# Altium PCB PCB_Songram-M071_2024-09-20.pcbdoc
Units mil, origin at the board's own origin, x right, y up, seen from the top; angles counter-clockwise.
Board outline 5724.4 x 5724.4 mil, 2 copper layers (Top Layer, Bottom Layer); 9 components, 38 nets, 66 pads, 4 vias.
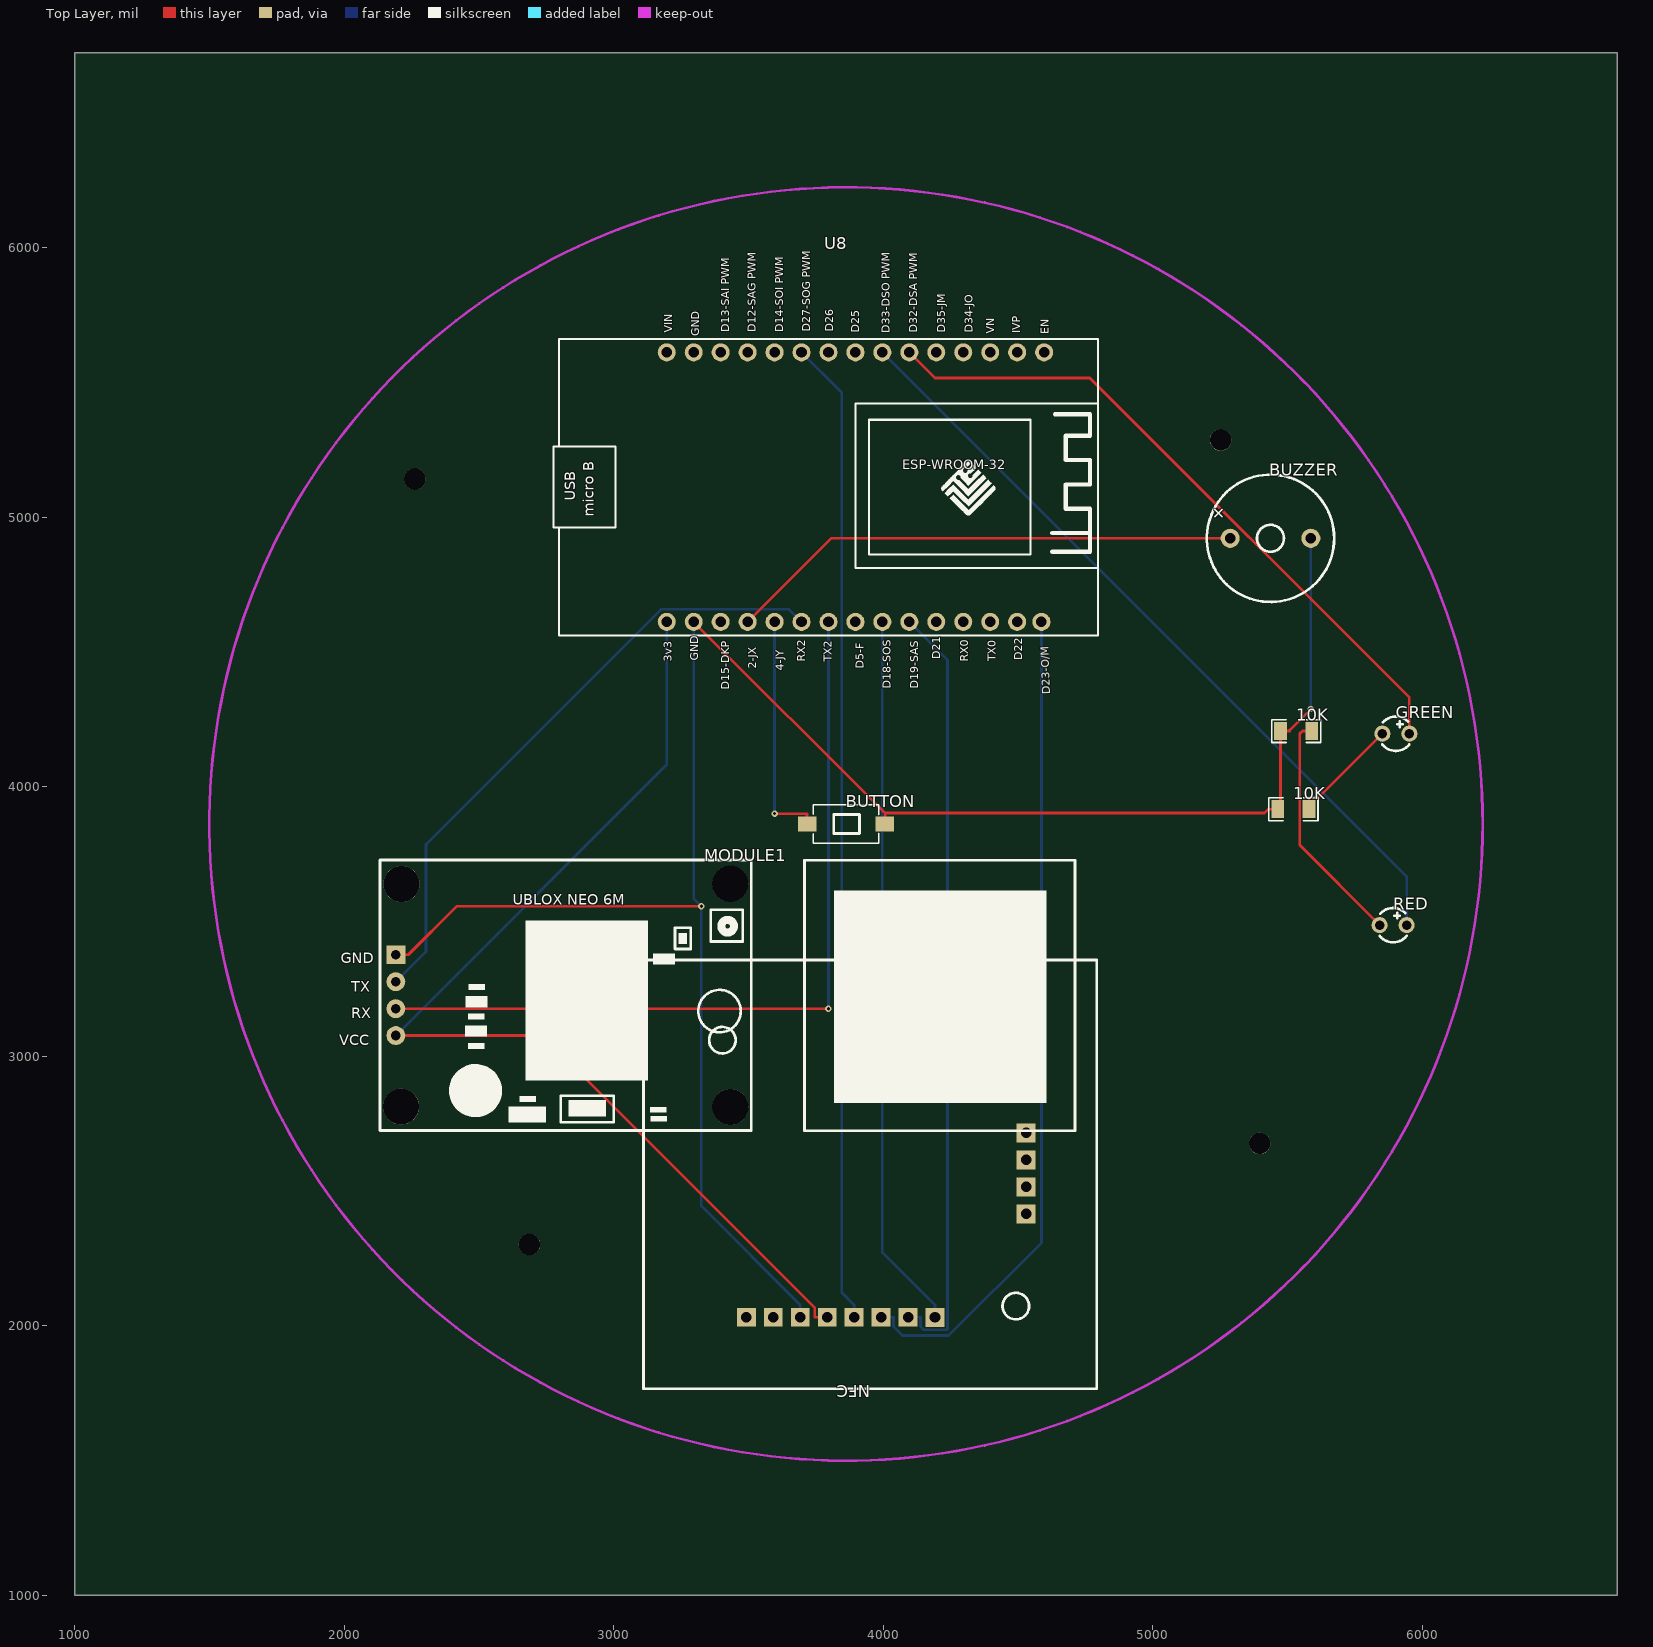
[diagram p0: Top Layer view]
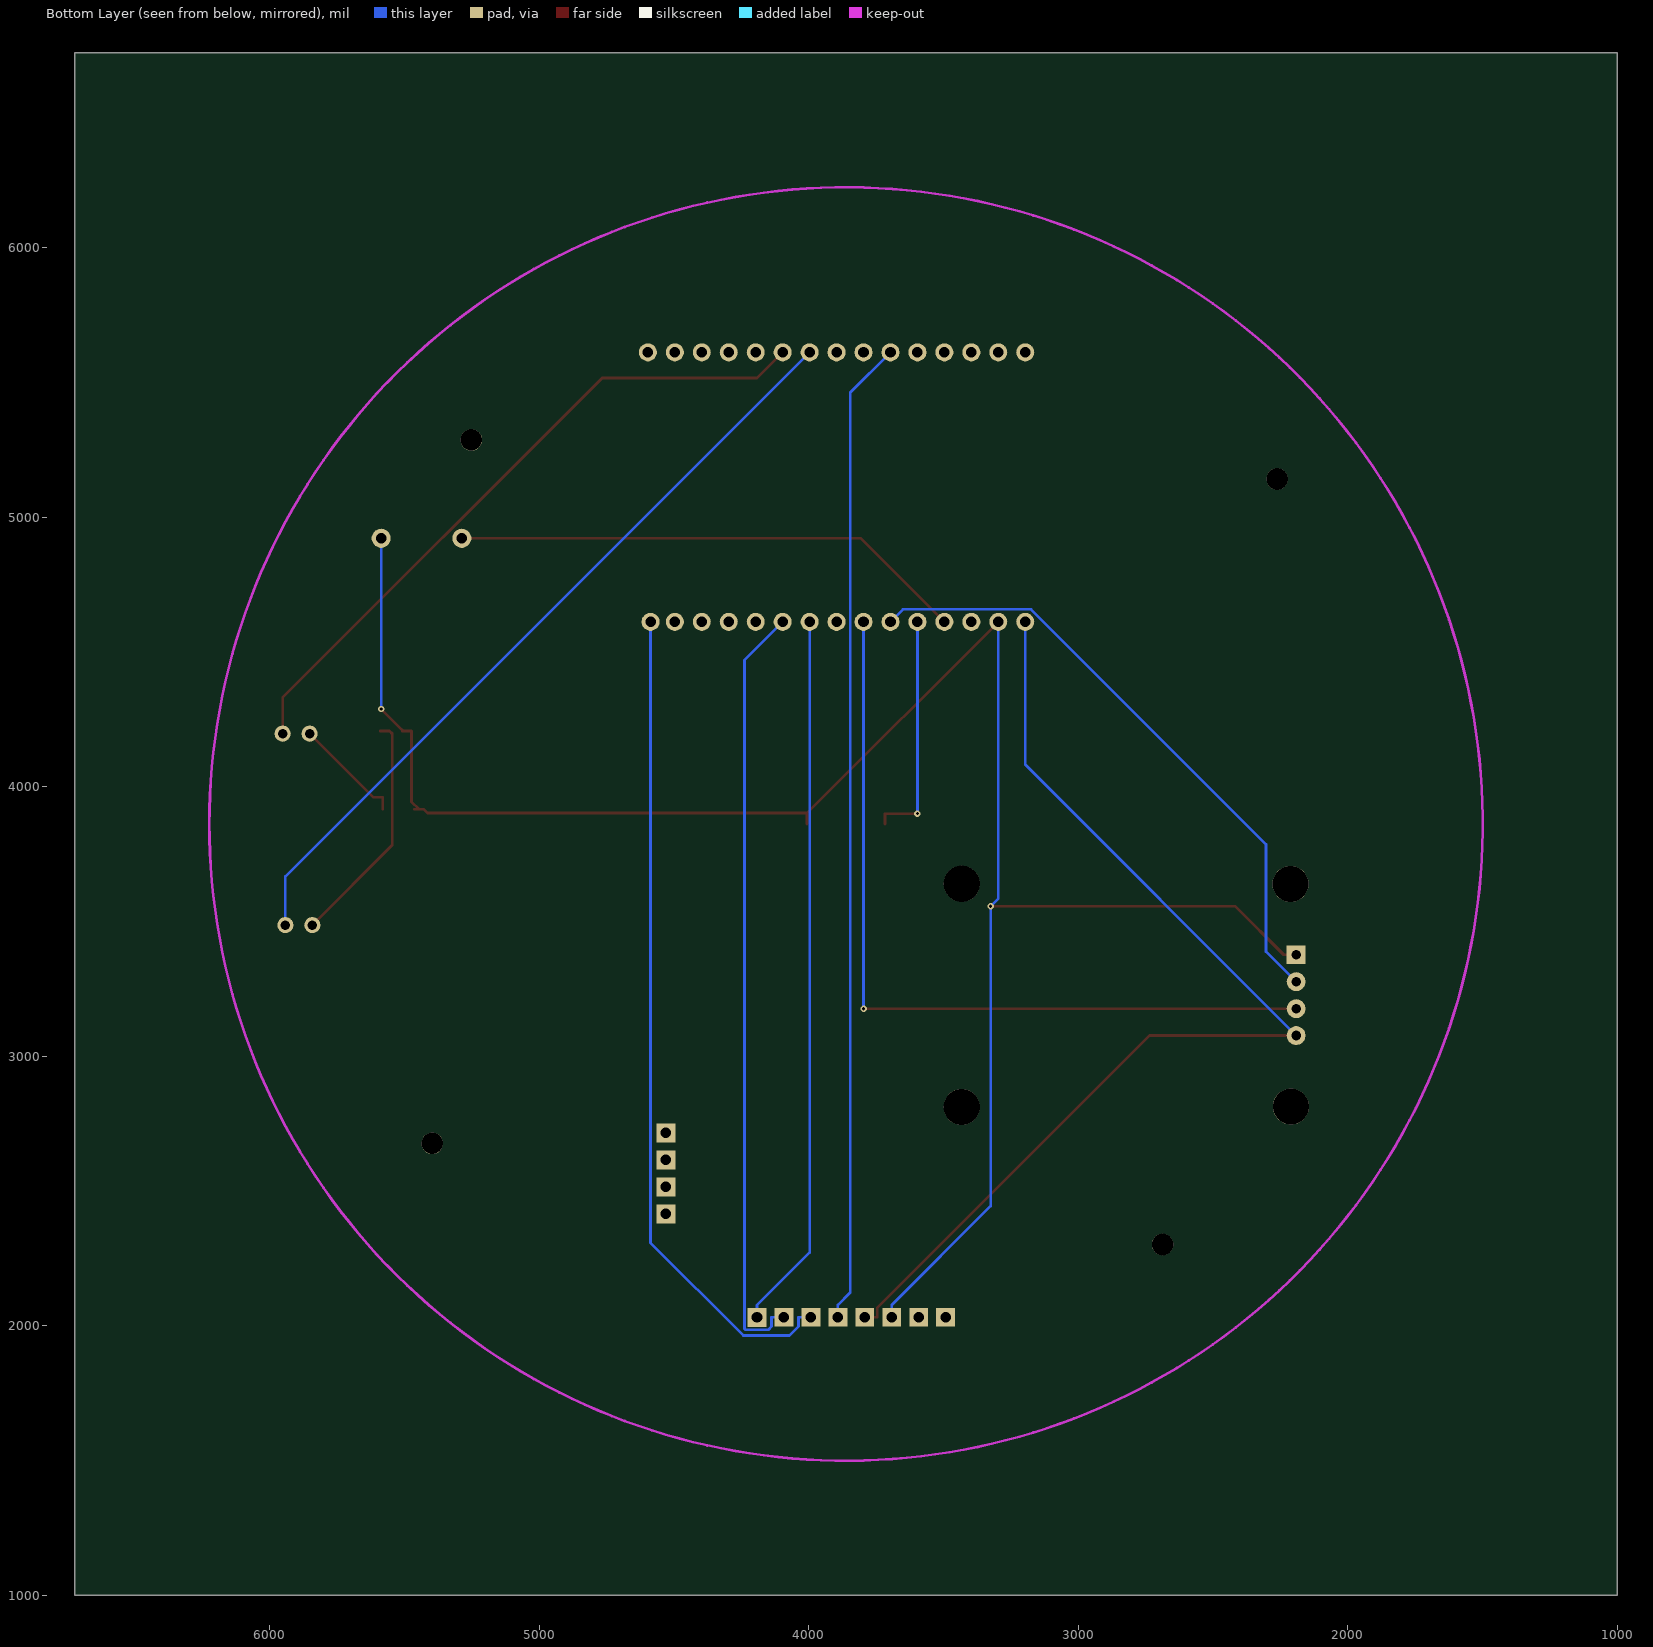
[diagram p1: Bottom Layer view, seen from below]

## Layer stack, top to bottom
Top Layer: signal copper (thickness not stored)
Dielectric: dielectric 12.6, FR-4, Dk 4.8
Bottom Layer: signal copper (thickness not stored)

## Board outline
6724.4,1000 1000,1000 1000,6724.4 6724.4,6724.4

## Components (designator, comment, footprint, x,y, rotation, side; value= is the part's Value field where it differs from the comment)
10K "10kΩ" R1206 5532.2,4207.2 r0 top
10K "10kΩ" R1206 5522.2,3917.2 r0 top
BUTTON "BUTTON2" SW-SMD_L6.0-W3.5-LS8.0-1 3862.2,3862.2 r0 top
BUZZER "BUZZER-12X9" BUZ-TH_BD12.0-P7.60-D0.6-FD 5437.2,4922.2 r0 top
GREEN "Green" LED-TH_BD3.0-P2.54-RD-RED 5902.2,4197.2 r0 top
MODULE1 "UBLOX NEO 6M GPS MODULE" "UBLOX NEO 6M GPS MODULE" 2192.2,3377.2 r0 top
NFC "PN532 NFC RFID module V3" "PN532 NFC RFID MODULE V3" 4792.2,1767.2 r180 top
RED "RED" LED-TH_BD3.0-P2.54-RD-RED 5892.2,3487.2 r0 top
U8 "esp-32-devkit" ESP-32-DEVKIT 3862.2,5067.2 r0 top

## Footprints (in the part's own frame and the unit in brackets; to place one, negate y for a bottom-side part, rotate by r counter-clockwise, add the part's x,y. Pads: shape width x height; smd on the part's side, far side on the other; paste and mask are expansions set on the pad)
BUZ-TH_BD12.0-P7.60-D0.6-FD [mm]
  round 1.8 hole 1 paste+0 mask+0.051: 1(-3.8,0) 2(3.8,0)
  silkscreen extent -6,-6 6,6
ESP-32-DEVKIT [mm]
  round 1.7 hole 1 paste+0 mask+0.102: 1(-16.891,-11.557) 2(-14.351,-11.557) 3(-11.811,-11.557) 4(-9.271,-11.557) 5(-6.731,-11.557) 6(-4.191,-11.557) 7(-1.651,-11.557) 8(0.889,-11.557) 9(3.429,-11.557) 10(5.969,-11.557) 11(8.509,-11.557) 12(11.049,-11.557) 13(13.589,-11.557) 14(16.129,-11.557) 15(18.415,-11.557) 16(18.669,13.843) 17(16.129,13.843) 18(13.589,13.843) 19(11.049,13.843) 20(8.509,13.843) 21(5.969,13.843) 22(3.429,13.843) 23(0.889,13.843) 24(-1.651,13.843) 25(-4.191,13.843) 26(-6.731,13.843) 27(-9.271,13.843) 28(-11.811,13.843) 29(-14.351,13.843) 30(-16.891,13.843)
  silkscreen extent -27.56,-12.83 23.75,15.11
LED-TH_BD3.0-P2.54-RD-RED [mil]
  round 60 hole 35.43 paste+0 mask+2: 1(-50,0) 2(50,0)
  silkscreen extent -50,-64 50,64
"PN532 NFC RFID MODULE V3" [mil]
  rect 70x70 hole 39 paste+0 mask+2: 1(261.65,-948.66) 2(261.65,-848.66) 3(261.65,-748.66) 4(261.65,-648.66) 5(599.8,-264.29) 6(699.8,-265) 7(799.8,-265) 8(899.8,-265) 9(999.8,-265) 10(1099.8,-265) 11(1199.8,-265) 12(1299.8,-265)
  silkscreen extent 0,-1591 1681,0
R1206 [mil]
  rect 47.54x66.97 smd paste-3937.01 mask+2: 1(-58.22,0) 2(58.22,0)
  silkscreen extent -91,-42 91,42
SW-SMD_L6.0-W3.5-LS8.0-1 [mm]
  rect 1.74x1.4 smd paste+0 mask+0.051: 1(-3.67,0) 2(3.67,0)
  silkscreen extent -3.08,-1.83 3.08,1.83
"UBLOX NEO 6M GPS MODULE" [mm]
  rect 1.778x1.778 hole 0.914 paste+0 mask+0.102: 1(0,0)
  round 1.778 hole 0.914 paste+0 mask+0.102: 2(0,-2.54) 3(0,-5.08) 4(0,-7.62)
  round 3.4 hole 3.4 unplated paste+0: ""(0.494,-14.311) ""(0.525,6.664) ""(31.508,-14.344) ""(31.508,6.692)
  silkscreen extent -1.5,-16.58 64,8.93

## Free pads (board coordinates)
  round 80 hole 80 unplated paste+0: ""(2262.2,5142.2) ""(2687.2,2302.2) ""(5252.2,5287.2) ""(5397.2,2677.2)

## Via types
v1: diameter 24.02, hole 12.01, Top Layer to Bottom Layer, tented both sides, 4 vias

## Nets (pads, with @x,y where several pads share a name; then routed paths per layer and width w, separated by ;. In a path a pad name is that pad's centre, name@x,y a point inside that pad or via, vN(x,y) a via of type N, cw(c..) or ccw(c..) an arc to the next point about the centre after c; other vN are vias at no path point)
BUTTON_+: BUTTON.1 U8.5 | length 870.5
  Top Layer w10: v1(3597.21,3900.75) 3717.71,3900.75 BUTTON.1
  Bottom Layer w10: v1(3597.21,3900.75) U8.5
BUZZER_+: BUZZER.1 U8.4 | length 1918.8
  Top Layer w10: U8.4 3807.2,4922.2 BUZZER.1
GND: 10K.1 BUTTON.2 BUZZER.2 MODULE1.1 NFC.10 U8.2 | length 7542.2
  Top Layer w10: MODULE1.1 2238.19,3377.2 2417.89,3556.9 v1(3325.7,3556.9) ; U8.2 4006.69,3902.73 ; BUTTON.2 4006.69,3902.73 ; 10K.1@5463.98,3917.2 10K.1@5446.6,3917.2 ; v1(5586.81,4288.9) 5508.74,4210.83 5508.74,4207.2 5473.98,4207.2 5473.98,3944.58 10K.1@5446.6,3917.2 ; 4006.69,3902.73 5414.75,3902.73 5429.22,3917.2 10K.1@5446.6,3917.2
  Bottom Layer w10: U8.2 3297.21,3585.39 v1(3325.7,3556.9) 3325.7,2444.89 3692.4,2078.19 NFC.10 ; v1(5586.81,4288.9) BUZZER.2
GPS_RX: MODULE1.3 U8.7 | length 3040
  Top Layer w10: MODULE1.3 v1(3797.21,3177.2)
  Bottom Layer w10: v1(3797.21,3177.2) U8.7
GPS_TX: MODULE1.2 U8.6 | length 2329.4
  Bottom Layer w10: MODULE1.2 2303.76,3388.76 2303.76,3786.66 3175.52,4658.42 3651,4658.42 U8.6
GREEN_LED_+: GREEN.2 U8.21 | length 2519.6
  Top Layer w10: U8.21 4192.64,5516.78 4766.57,5516.78 5952.2,4331.15 GREEN.2
NFC_MOSI: NFC.7 U8.15 | length 3089.5
  Bottom Layer w10: NFC.7 4038.39,2032.2 4038.39,1997.71 4071.91,1964.19 4242.92,1964.19 4587.21,2308.48 U8.15
NFC_MSO: NFC.6 U8.10 | length 2869.2
  Bottom Layer w10: NFC.6 4138.39,2032.2 4138.39,1997.71 4150.67,1985.43 4235.55,1985.43 4238.46,1988.34 4238.46,4470.96 U8.10
NFC_SCK: NFC.5 U8.9 | length 2661.6
  Bottom Layer w10: U8.9 3997.21,2272.67 4192.4,2077.48 NFC.5
NFC_SS: NFC.8 U8.25 | length 3660.9
  Bottom Layer w10: U8.25 3846.41,5463.01 3846.41,2124.18 3892.4,2078.19 NFC.8
POWER: MODULE1.4 NFC.9 U8.1 | length 4004.6
  Top Layer w10: MODULE1.4 2735.9,3077.2 3746.41,2066.69 3746.41,2032.2 NFC.9
  Bottom Layer w10: MODULE1.4 3197.21,4082.21 U8.1
RED_LED_+: RED.2 U8.22 | length 2930.7
  Bottom Layer w10: U8.22 5942.2,3667.22 RED.2
U1_1: NFC.1
U1_2: NFC.2
U1_3: NFC.3
U1_4: NFC.4
U1_11: NFC.11
U1_12: NFC.12
U2_1: 10K.2@5590.42,4207.2 RED.1 | length 881.8
  Top Layer w10: 10K.2@5590.42,4207.2 5555.66,4207.2 5545.59,4197.13 5545.59,3783.81 RED.1
U3_1: 10K.2@5580.42,3917.2 GREEN.1 | length 413.8
  Top Layer w10: 10K.2@5580.42,3917.2 5580.42,3961.67 5616.67,3961.67 GREEN.1
U8_3: U8.3
U8_8: U8.8
U8_11: U8.11
U8_12: U8.12
U8_13: U8.13
U8_14: U8.14
U8_16: U8.16
U8_17: U8.17
U8_18: U8.18
U8_19: U8.19
U8_20: U8.20
U8_23: U8.23
U8_24: U8.24
U8_26: U8.26
U8_27: U8.27
U8_28: U8.28
U8_29: U8.29
U8_30: U8.30
pads on no net: MODULE1.

## Keep-outs
Keep-Out Layer:
  circle w10: c3862.2,3862.2 r2362.2

## Text inside footprints (layer, text, board x,y; h text height)
BUZZER: Top Overlay "+" at 5279.89,5009.38 h50 r135
MODULE1: Top Overlay "GND" at 1987.43,3344.99 h39.37; Top Overlay "TX" at 2026.03,3239.36 h39.37; Top Overlay "RX" at 2026.03,3140.61 h39.37; Top Overlay "VCC" at 1982.03,3042.2 h39.37; Top Overlay "UBLOX NEO 6M" at 2625.27,3561.84 h39.37
U8: Top Overlay "VIN" at 3217.71,5684.25 h30 r90; Top Overlay "USB" at 2856.89,5062.21 h39.37 r90; Top Overlay "micro B" at 2926.89,5002.21 h39.37 r90; Top Overlay "ESP-WROOM-32" at 4070.82,5178.34 h35.43; Top Overlay "GND" at 3318.1,5672.44 h30 r90; Top Overlay "D13-SAI PWM" at 3428.34,5686.22 h30 r90; Top Overlay "D12-SAG PWM" at 3526.76,5686.22 h30 r90; Top Overlay "D14-SOI PWM" at 3629.13,5686.22 h30 r90; Top Overlay "D27-SOG PWM" at 3729.52,5688.19 h30 r90; Top Overlay "D26" at 3814.17,5688.19 h30 r90; Top Overlay "D25" at 3910.62,5684.25 h30 r90; Top Overlay "D33-DSO PWM" at 4024.79,5682.28 h30 r90; Top Overlay "D32-DSA PWM" at 4127.16,5684.25 h30 r90; Top Overlay "D35-JM" at 4229.52,5684.25 h30 r90; Top Overlay "D34-JO" at 4331.88,5684.25 h30 r90; Top Overlay "VN" at 4412.59,5680.31 h30 r90; Top Overlay "IVP" at 4509.05,5682.28 h30 r90; Top Overlay "RX0" at 4316.13,4463.78 h30 r90; Top Overlay "3v3" at 3215.74,4463.78 h30 r90; Top Overlay "GND" at 3314.17,4467.72 h30 r90; Top Overlay "D15-DKP" at 3428.34,4359.45 h30 r90; Top Overlay "2-JX" at 3528.73,4438.19 h30 r90; Top Overlay "4-JY" at 3631.09,4430.31 h30 r90; Top Overlay "RX2" at 3711.8,4463.78 h30 r90; Top Overlay "TX2" at 3810.23,4463.78 h30 r90; Top Overlay "D5-F" at 3928.34,4438.19 h30 r90; Top Overlay "D18-SOS" at 4028.73,4363.38 h30 r90; Top Overlay "D19-SAS" at 4131.09,4363.38 h30 r90; Top Overlay "D21" at 4212.2,4473.62 h30 r90; Top Overlay "TX0" at 4418.49,4465.75 h30 r90; Top Overlay "D22" at 4516.92,4469.68 h30 r90; Top Overlay "D23-O/M" at 4619.27,4344.22 h30 r92; Top Overlay "EN" at 4615.34,5678.34 h30 r90